# Altium PCB PCB.PcbDoc (part 1 of 2)
Units mil, origin at the board's own origin, x right, y up, seen from the top; angles counter-clockwise.
Board outline 1675.38 x 2135.38 mil, 2 copper layers (Top Layer, Bottom Layer), stack 54.768 mil thick; 71 components, 62 nets, 275 pads, 248 vias.
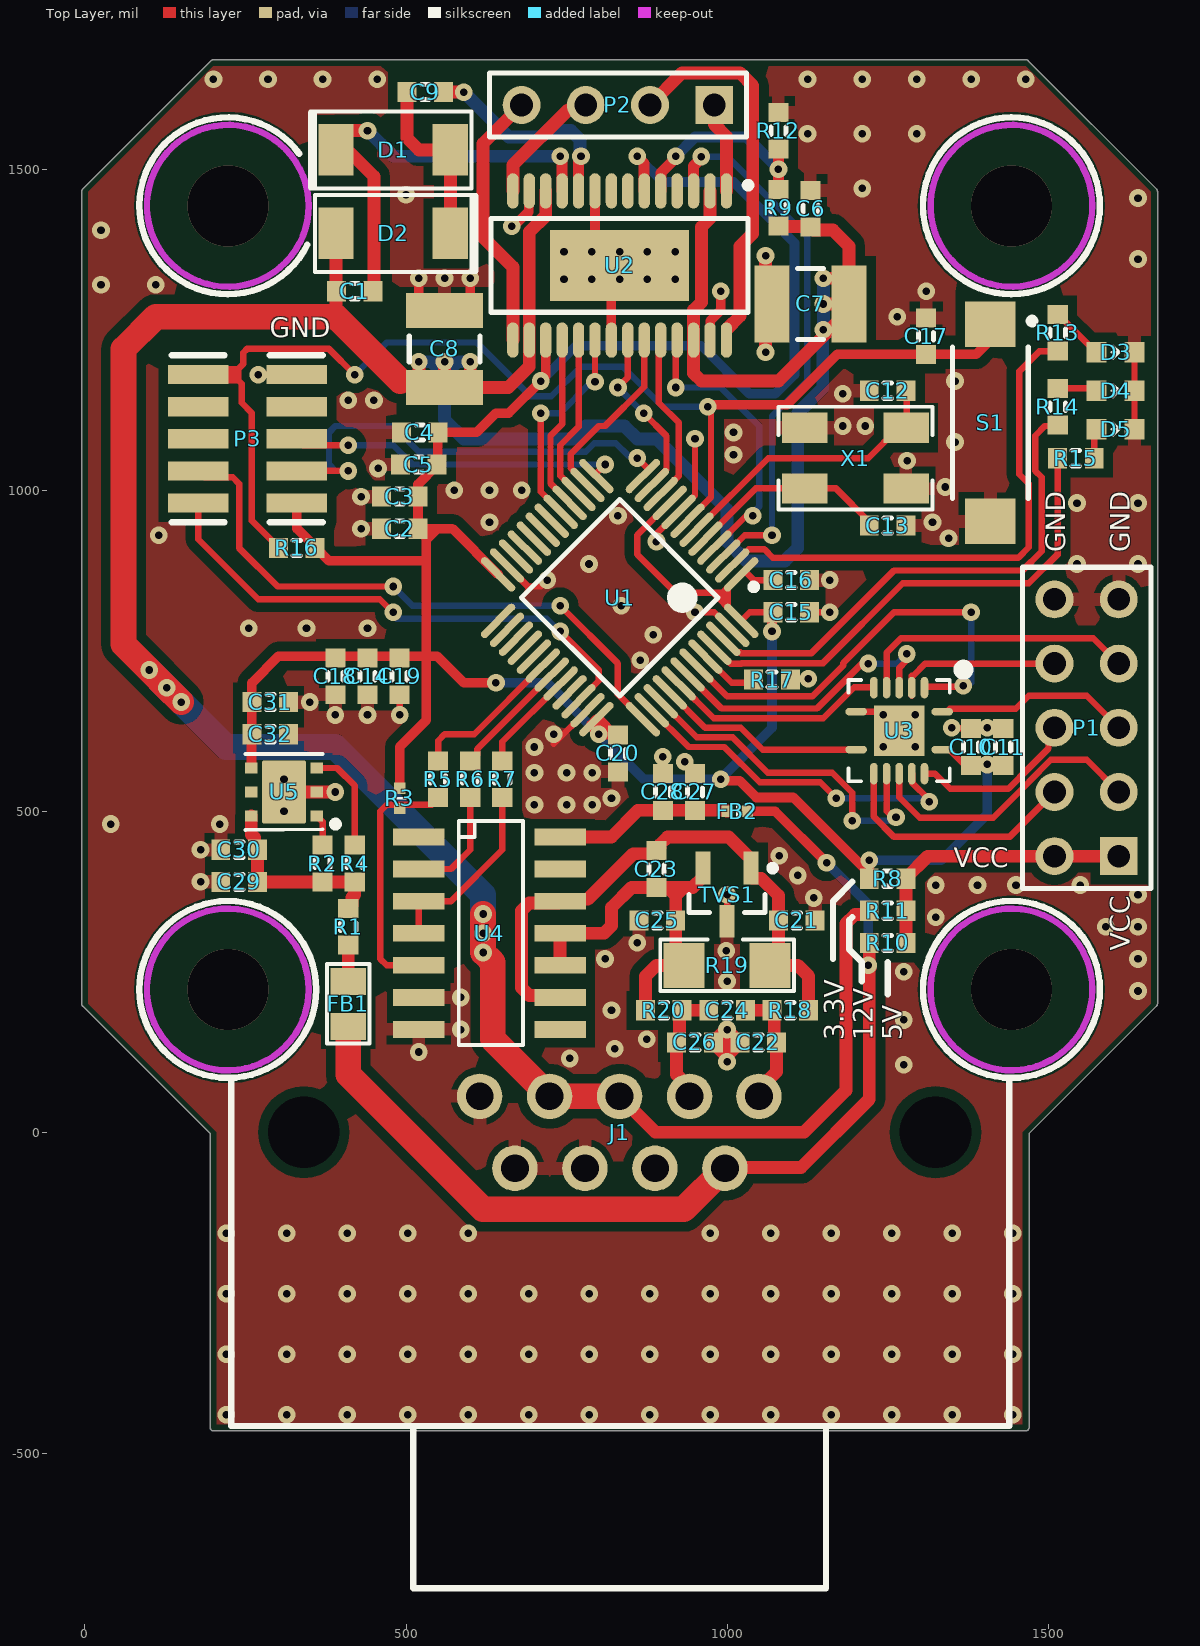
[diagram p0: Top Layer view]
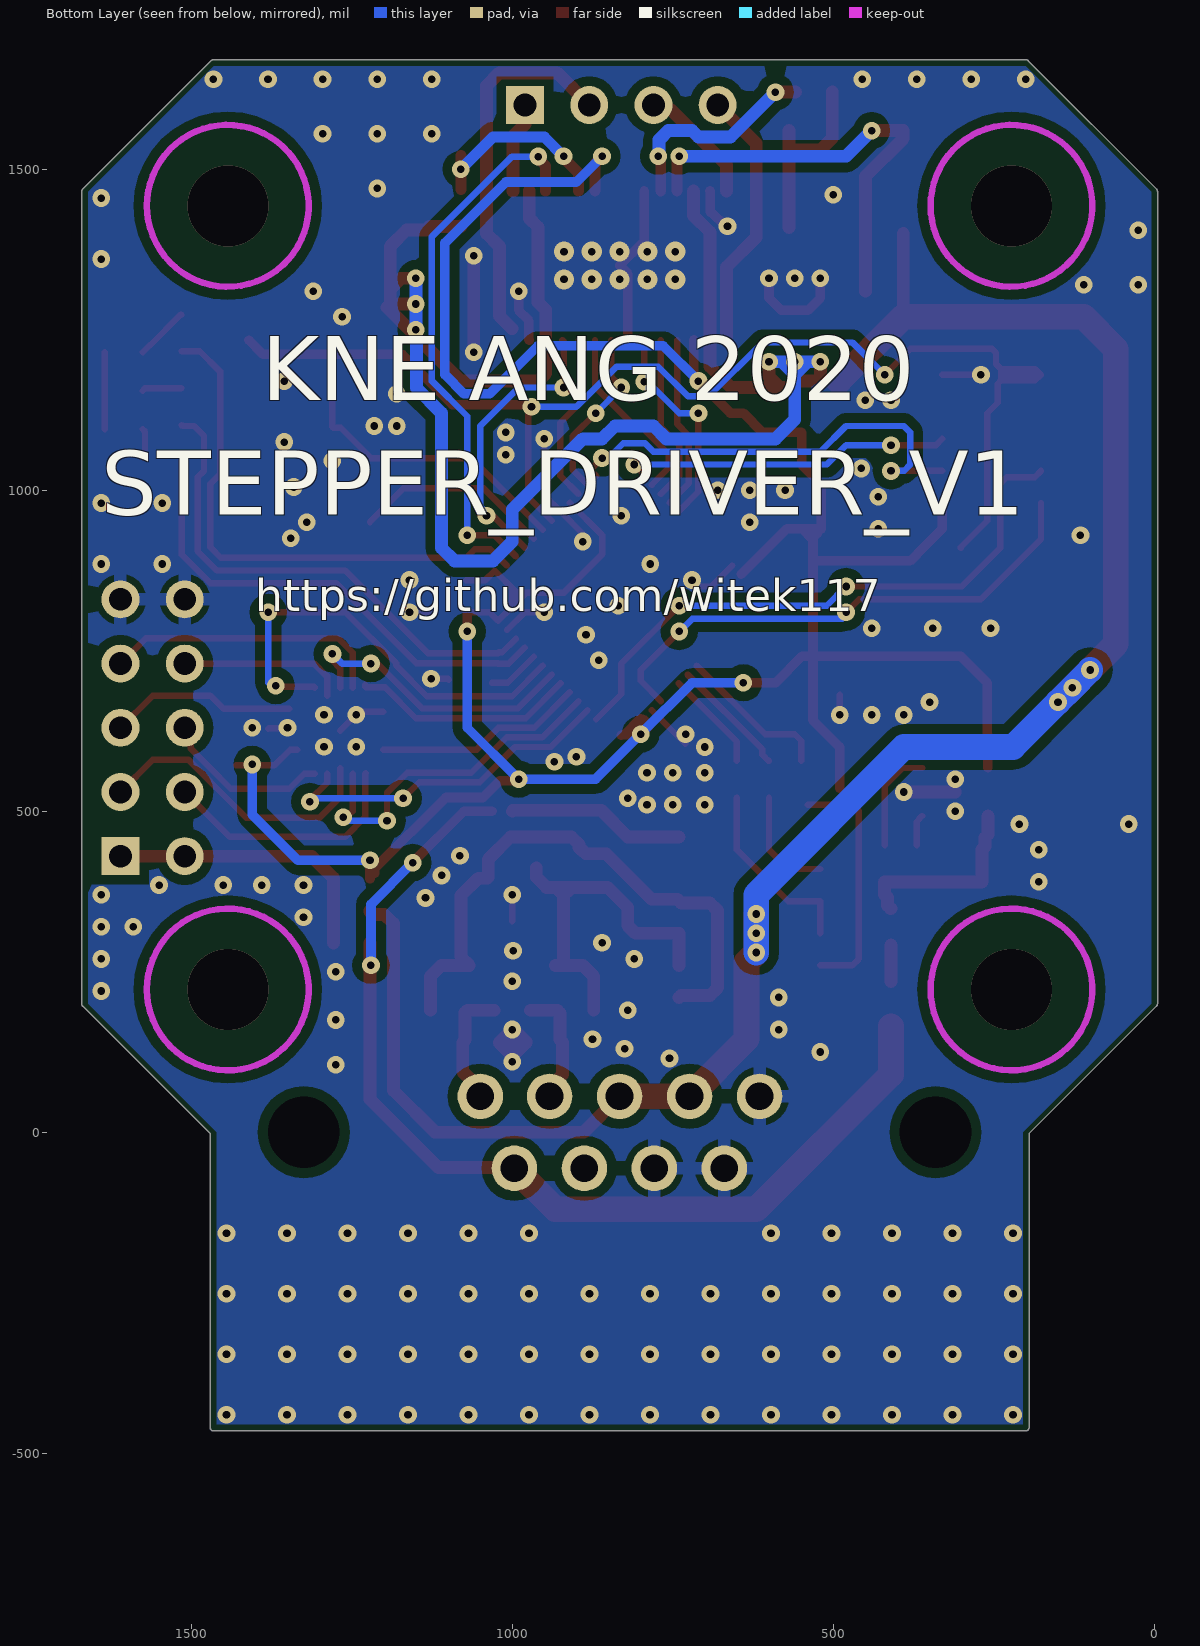
[diagram p1: Bottom Layer view, seen from below]
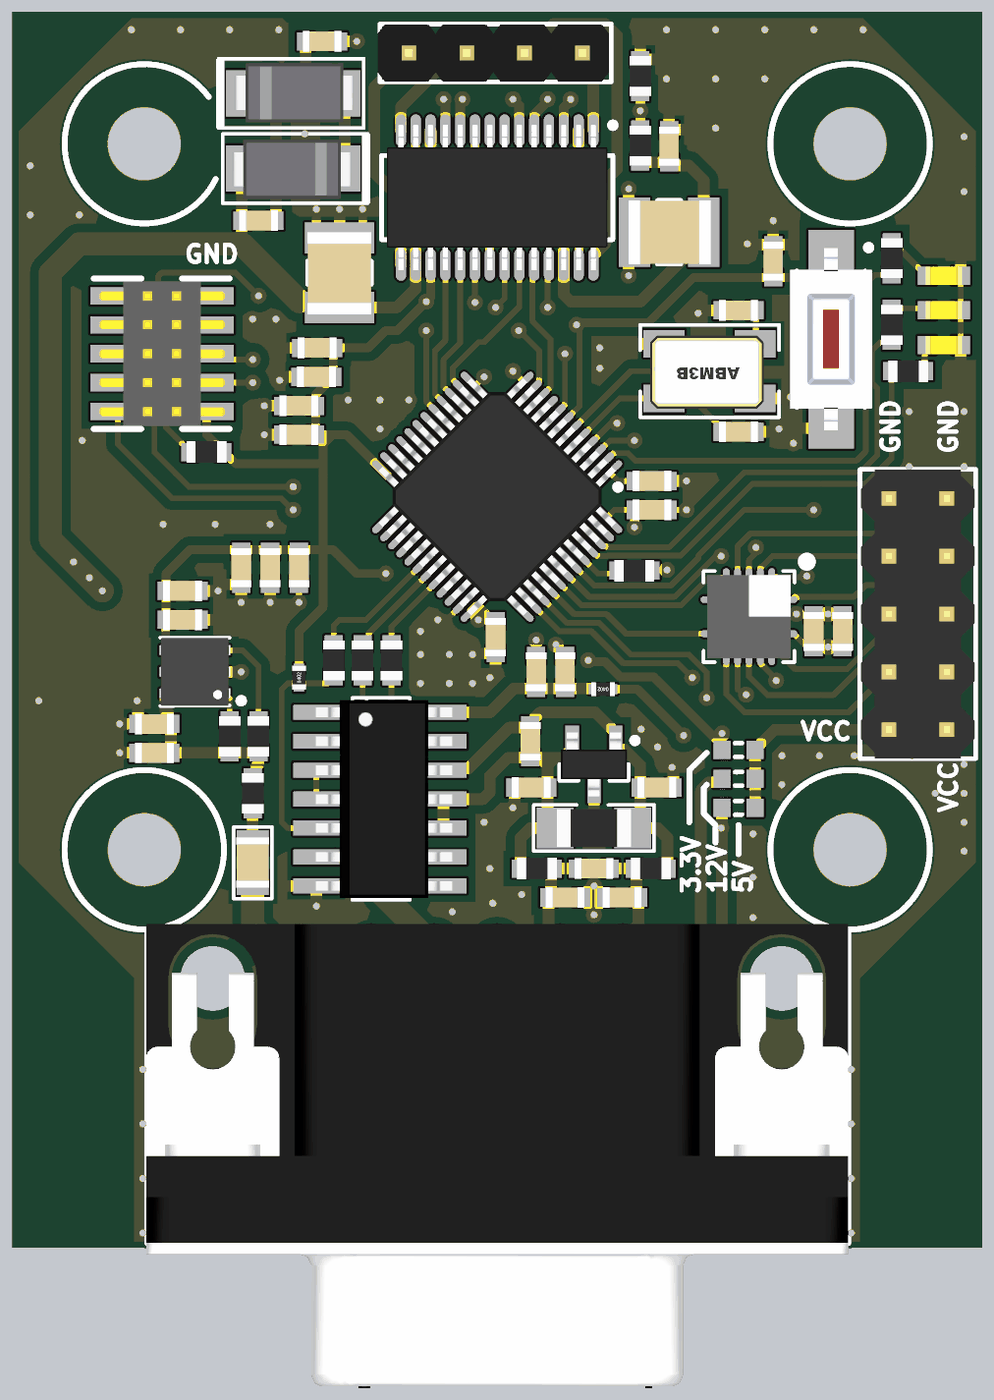
[diagram p2: 3D render of the assembled board from above, using the file's embedded part models]

## Layer stack, top to bottom
Top Solder: solder mask 0.4, Solder Resist, Dk 3.5
Top Layer: signal copper 1.4
Dielectric 1: dielectric 51.9685, FR-4, Dk 4.8
Bottom Layer: signal copper 1.4
Bottom Solder: solder mask 0.4, Solder Resist, Dk 3.5

## Board outline
194.99,-460 194.99,-2.08 -3.55,196.45 -3.53,196.44 cw(c0,200) -5.01,200 -5.01,1465.35 cw(c0,1465.35) -3.53,1468.92 -3.55,1468.9 196.45,1668.9 196.44,1668.88 cw(c200,1665.35) 200,1670.37 1465.35,1670.37 cw(c1465.35,1665.35) 1468.92,1668.88 1468.9,1668.9 1668.9,1468.9 1668.88,1468.92 cw(c1665.35,1465.35) 1670.37,1465.35 1670.37,200 cw(c1665.35,200) 1668.88,196.44 1668.9,196.45 1470.37,-2.08 1470.37,-460 cw(c1465.35,-460) 1465.35,-465.02 200,-465.02 cw(c200,-460)

## Design rules (kind name [scope] priority, off if disabled: settings)
Clearance [All] p1: gap=5 ignorepadtopadclearanceinfootprint=FALSE except(15: Arc-Poly Track-Poly SMDPad-Poly THPad-Poly Via-Poly Fill-Poly Poly-Poly Poly-Region Poly-Text Poly-Hole)
HoleSize [All] p1: absolutevalues=TRUE maxlimit=157.48 minlimit=1 maxpercent=80.000 minpercent=20.000
MinimumSolderMaskSliver [All] p1: minsoldermaskwidth=2
PolygonConnect PolygonConnect_via [IsVia] p1: connectstyle=Direct reliefconductorwidth=20 reliefentries=4 polygonreliefangle="90 Angle" airgapwidth=10
PolygonConnect [All] p2: connectstyle=Relief reliefconductorwidth=20 reliefentries=4 polygonreliefangle="90 Angle" airgapwidth=10
RoutingVias [All] p1: holewidth=28 width=50 viastyle="Through Hole" minholewidth=7.87 minwidth=19.68 maxholewidth=157.48 maxwidth=157.48
SilkToSilkClearance [All] p1: silktosilkclearance=5
SilkToSolderMaskClearance [IsPad] p1: minsilkscreentomaskgap=2 clearancetoexposedcopper=TRUE
SolderMaskExpansion [All] p1: expansion=4 istentingtop=FALSE
Width [All] p1: maxlimit=50 minlimit=6 preferedwidth=10
26 further rules are at their usual default settings.

## Classes and differential pairs
component class U_LD39050PU33R: C26 C29 C32
component class top: C5 C6 C7 C8 C9 C10 C11 C19 C25 C26 C29 C32 D1 D2 D3 D4 D5 FB1 J1 P1 R1 R2 R3 R4 R5 R6 R8 R9 R10 R11 R15 R16 U2 U3 X1
component class Designator: C23 C27 FB2 U3
component class Designator: C21 C22 C23 C25 C26 C27 R14 R15 R20 TVS1

## Components (designator, comment, footprint, x,y, rotation, side; value= is the part's Value field where it differs from the comment)
C1 "Ceramic X7R" C_0603_1608 420,1310 r180 top value=220nF
C2 "Ceramic X5R" C_0603_1608 490,940 r180 top value=10uF
C3 "Ceramic X7R" C_0603_1608 490,990 r180 top value=100nF
C4 "Ceramic X5R" C_0603_1608 521.46,1090 r180 top value=10uF
C5 "Ceramic X7R" C_0603_1608 520,1040 r180 top value=100nF
C6 "Ceramic X7R" C_0603_1608 1130,1438.54 r90 top value=220nF
C7 "Ceramic X5R" C_1210_3225 1130,1290 r180 top value=100uF
C8 "Ceramic X5R" C_1210_3225 560,1220 r90 top value=100uF
C9 "Ceramic C0G" C_0603_1608 530,1620 r0 top value=10nF
C10 "Ceramic X7R" C_0603_1608 1380,600 r90 top value=100nF (schematic designator C19)
C11 "Ceramic X7R" C_0603_1608 1430,600 r90 top value=100nF (schematic designator C20)
C12 "Ceramic C0G" C_0603_1608 1250,1155 r180 top value=22pF (schematic designator C10)
C13 "Ceramic C0G" C_0603_1608 1250,945 r0 top value=22pF (schematic designator C11)
C14 "Ceramic X5R" C_0603_1608 440,710 r270 top value=4.7uF (schematic designator C12)
C15 "Ceramic X7R" C_0603_1608 1100,810 r0 top value=100nF (schematic designator C13)
C16 "Ceramic X7R" C_0603_1608 1100,860 r0 top value=100nF (schematic designator C14)
C17 "Ceramic X7R" C_0603_1608 1310,1240 r90 top value=100nF (schematic designator C15)
C18 "Ceramic X5R" C_0603_1608 390,710 r270 top value=2.2uF (schematic designator C16)
C19 "Ceramic X7R" C_0603_1608 490,710 r270 top value=100nF (schematic designator C17)
C20 "Ceramic X7R" C_0603_1608 830,590 r270 top value=100nF (schematic designator C18)
C21 "Ceramic C0G" C_0603_1608 1108.54,330 r0 top value=1nF (schematic designator C26)
C22 "Ceramic C0G" C_0603_1608 1048.54,140 r180 top value=100pF (schematic designator C27)
C23 "Ceramic C0G" C_0603_1608 890,410 r270 top value=1nF (schematic designator C28)
C24 "Ceramic C0G" C_0603_1608 1000,190 r180 top value=100pF (schematic designator C29)
C25 "Ceramic C0G" C_0603_1608 891.46,330 r180 top value=1nF (schematic designator C30)
C26 "Ceramic C0G" C_0603_1608 950,140 r0 top value=100pF (schematic designator C31)
C27 "Ceramic X7R" C_0603_1608 950,530 r90 top value=1uF (schematic designator C24)
C28 "Ceramic X7R" C_0603_1608 900,530 r90 top value=100nF (schematic designator C25)
C29 "Ceramic X7R" C_0603_1608 240,390 r180 top value=1uF (schematic designator C1)
C30 "Ceramic X7R" C_0603_1608 240,440 r180 top value=1uF (schematic designator C2)
C31 "Ceramic X7R" C_0603_1608 288.54,670 r0 top value=1uF (schematic designator C3)
C32 "Ceramic X7R" C_0603_1608 288.54,620 r0 top value=1uF (schematic designator C4)
D1 "S1B-E3" SMA_DO-214AC 480,1530 r0 top value=S1B-E3/5AT
D2 "S1B-E3" SMA_DO-214AC 480,1400 r180 top value=S1B-E3/5AT
D3 "Green Led" OL_0603_1608 1605,1215 r180 top value=LTST-C190TGKT
D4 "Green Led" OL_0603_1608 1605,1155 r180 top value=LTST-C190TGKT
D5 "Green Led" OL_0603_1608 1605,1095 r180 top value=LTST-C190TGKT
FB1 "Ferrite bead" FB_0805_2012 410,200 r90 top value=742792022
FB2 "Ferrite bead" FB_0402_1005 1015.75,500 r180 top value=BLM15EG121SH1D (schematic designator FB3)
J1 "DSUB 9 Pin" J_DSUB_MHDD9F-T-B-S-RBM 832.68,0 r0 top value=MHDD9F-T-B-S-RBM
P1 "Goldpin male" P_HEADER_2x5_2.54 1610,430 r90 top value=DS1021-2*5SF11 (schematic designator P3)
P2 "Goldpin" P_HEADER_1x4_2.54 980,1600 r180 top value=DS1021-1*4SF1-1 (schematic designator P1)
P3 "Jtag" P_HEADER_2x5_1.27 250,1080 r90 top value=20021121-00010C4LF (schematic designator P2)
R1 "Resistor" R_0603_1608 410,320 r90 top value=1R
R2 "Resistor" R_0603_1608 370,418.54 r90 top value=100k
R3 "Resistor" R_0402_1005 490,520 r90 top value=100k
R4 "Resistor" R_0603_1608 420,418.54 r90 top value=100k
R5 "Resistor" R_0603_1608 550,550 r270 top value=10R
R6 "Resistor" R_0603_1608 600,550 r90 top value=10R (schematic designator R7)
R7 "Resistor" R_0603_1608 650,550 r270 top value=10R (schematic designator R8)
R8 "Resistor" R_NC_0603_1608 1250,395 r0 top value=NC (schematic designator R12)
R9 "Resistor" R_0603_1608 1080,1440 r270 top value=64.9k
R10 "Resistor" R_NC_0603_1608 1250,295 r0 top value=NC (schematic designator R13)
R11 "Resistor" R_NC_0603_1608 1250,345 r0 top value=NC (schematic designator R14)
R12 "Resistor" R_0603_1608 1080,1560 r270 top value=2.7k (schematic designator R10)
R13 "Resistor" R_0603_1608 1515,1245 r90 top value=2.7k (schematic designator R17)
R14 "Resistor" R_0603_1608 1515,1130 r90 top value=2.7k (schematic designator R18)
R15 "Resistor" R_0603_1608 1543.31,1049.84 r0 top value=2.7k (schematic designator R19)
R16 "Resistor" R_0603_1608 330,910 r180 top value=10k (schematic designator R6)
R17 "Resistor" R_0603_1608 1070,705 r180 top value=100k (schematic designator R11)
R18 "Resistor" R_0603_1608 1098.54,190 r0 top value=10R (schematic designator R15)
R19 "Resistor" R_1206_3216 1000,260 r0 top value=120R (schematic designator R16)
R20 "Resistor" R_0603_1608 901.46,190 r180 top value=10R (schematic designator R28)
S1 "3x6mm" S_TACTSWITCH3x6 1410,1105 r270 top
TVS1 "TVS double bidirectional" SOT23_N 1000,370 r270 top value=CDSOT23-SM712 (schematic designator TVS5)
U1 "STM32F103C8T6" LQFP48_7x7 832.68,832.68 r225 top (schematic designator U3)
U2 "Fully integrated microstepping motor driver with motion engine and SPI" HTSSOP28 832.68,1350 r270 top value=L6470HTR
U3 "Open drain buffer" QFN14_4x4 1268.07,625.47 r180 top value=SN74LVC06ARGYR (schematic designator U4)
U4 "MAX3076 Series 16 Mbps 6 V Full Duplex SMT RS 485 Transceiver - SOIC-14" SOP14_SO14_SOIC14_4X9X18 630,310 r270 top value=MAX3076EASD+ (schematic designator U1)
U5 "LD39050PU33R" DFN6_3x3 310,530 r90 top (schematic designator U1)
X1 "8MHz" X_ABM3B_5X3X11 1200,1050 r0 top

## Footprints (in the part's own frame and the unit in brackets; to place one, negate y for a bottom-side part, rotate by r counter-clockwise, add the part's x,y. Pads: shape width x height; smd on the part's side, far side on the other; paste and mask are expansions set on the pad)
C_0603_1608 [mm]
  rect 0.75x0.8 smd: 1(-0.725,0) 2(0.725,0)
  silkscreen extent -0.15,-0.3 0.15,0.3, body extent -0.85,-0.45 0.85,0.45, height 0.89
C_1210_3225 [mil]
  rect 54x120 smd: 1(-60,0) 2(60,0)
  silkscreen extent -20,-55 20,55, body extent -72,-55 70,55, height 86
DFN6_3x3 [mm]
  rect 0.45x0.5 smd: 1(-0.95,-1.3) 2(0,-1.3) 3(0.95,-1.3) 4(0.95,1.3) 5(0,1.3) 6(-0.95,1.3)
  rrect10% 2.5x1.75 smd: EP1(0,0)
  silkscreen extent -1.5,-2.16 1.5,1.52, body extent -1.5,-1.55 1.5,1.55, height 0.75
FB_0402_1005 [mm]
  rect 0.45x0.45 smd: 1(-0.4,0) 2(0.4,0)
  silkscreen extent 0,-0.25 0,0.25, body extent -0.52,-0.3 0.52,0.3, height 0.34
FB_0805_2012 [mil]
  rect 42x55 smd: 1(-35,0) 2(35,0)
  silkscreen extent -62,-33 62,33, body extent -43,-29 44,29, height 53
HTSSOP28 [mm]
  oval 1.4x0.45 smd: 1(-2.95,4.225) 2(-2.95,3.575) 3(-2.95,2.925) 4(-2.95,2.275) 5(-2.95,1.625) 6(-2.95,0.975) 7(-2.95,0.325) 8(-2.95,-0.325) 9(-2.95,-0.975) 10(-2.95,-1.625) 11(-2.95,-2.275) 12(-2.95,-2.925) 13(-2.95,-3.575) 14(-2.95,-4.225) 15(2.95,-4.225) 16(2.95,-3.575) 17(2.95,-2.925) 18(2.95,-2.275) 19(2.95,-1.625) 20(2.95,-0.975) 21(2.95,-0.325) 22(2.95,0.325) 23(2.95,0.975) 24(2.95,1.625) 25(2.95,2.275) 26(2.95,2.925) 27(2.95,3.575) 28(2.95,4.225)
  rect 2.8x5.5 smd: EP1(0,0)
  silkscreen extent -3.3,-5.08 1.85,5.21, body extent -3.2,-4.85 3.2,4.85, height 0.92
J_DSUB_MHDD9F-T-B-S-RBM [mm] "D-SUB; 9 Position; Female"
  round 1.524 hole 2.845 unplated: 0(-12.497,0) 0(12.497,0)
  round 1.8 hole 1.1: 1(5.512,1.422) 2(2.769,1.422) 3(0,1.422) 4(-2.769,1.422) 5(-5.537,1.422) 6(4.166,-1.422) 7(1.397,-1.422) 8(-1.372,-1.422) 9(-4.14,-1.422)
  silkscreen extent -15.37,-18.04 15.42,2.16, body extent -15.42,-18 15.42,2.4, height 12.5
LQFP48_7x7 [mm] "LQFP, 48-Leads, Body 7x7mm, Pitch 0.5mm, IPC Medium Density"
  oval 1.8x0.3 smd: 1(-4.05,2.75) 2(-4.05,2.25) 3(-4.05,1.75) 4(-4.05,1.25) 5(-4.05,0.75) 6(-4.05,0.25) 7(-4.05,-0.25) 8(-4.05,-0.75) 9(-4.05,-1.25) 10(-4.05,-1.75) 11(-4.05,-2.25) 12(-4.05,-2.75) 25(4.05,-2.75) 26(4.05,-2.25) 27(4.05,-1.75) 28(4.05,-1.25) 29(4.05,-0.75) 30(4.05,-0.25) 31(4.05,0.25) 32(4.05,0.75) 33(4.05,1.25) 34(4.05,1.75) 35(4.05,2.25) 36(4.05,2.75)
  oval 0.3x1.8 smd: 13(-2.75,-4.05) 14(-2.25,-4.05) 15(-1.75,-4.05) 16(-1.25,-4.05) 17(-0.75,-4.05) 18(-0.25,-4.05) 19(0.25,-4.05) 20(0.75,-4.05) 21(1.25,-4.05) 22(1.75,-4.05) 23(2.25,-4.05) 24(2.75,-4.05) 37(2.75,4.05) 38(2.25,4.05) 39(1.75,4.05) 40(1.25,4.05) 41(0.75,4.05) 42(0.25,4.05) 43(-0.25,4.05) 44(-0.75,4.05) 45(-1.25,4.05) 46(-1.75,4.05) 47(-2.25,4.05) 48(-2.75,4.05)
  silkscreen extent -4.17,-2.75 2.75,3.57, body extent -4.5,-4.5 4.5,4.5, height 1.6
OL_0603_1608 [mm]
  rect 0.8x0.8 smd: 1(-0.75,0) 2(0.75,0)
  silkscreen extent -0.15,-0.25 0.15,0.25, body extent -0.8,-0.4 0.8,0.4, height 0.75
P_HEADER_1x4_2.54 [mm] "Connector; Header; 4 Position; Male"
  rect 1.5x1.5 hole 0.9: 1(0,0)
  round 1.5 hole 0.9: 2(2.54,0) 3(5.08,0) 4(7.62,0)
  silkscreen extent -1.27,-1.27 8.89,1.27, body extent -1.17,-1.25 8.99,1.25, height 8.2
P_HEADER_2x5_1.27 [mm]
  rect 0.76x2.4 smd: 1(-2.54,-2.032) 2(-2.54,1.868) 3(-1.27,-2.032) 4(-1.27,1.868) 5(0,-2.032) 6(0,1.868) 7(1.27,-2.032) 8(1.27,1.868) 9(2.54,-2.032) 10(2.54,1.868)
  silkscreen extent -3.3,-3.05 3.3,2.92, body extent -3.17,-2.83 3.18,2.67, height 4.51
P_HEADER_2x5_2.54 [mm] "Connector; Header"
  rect 1.5x1.5 hole 0.9: 1(0,0)
  round 1.5 hole 0.9: 2(0,2.54) 3(2.54,0) 4(2.54,2.54) 5(5.08,0) 6(5.08,2.54) 7(7.62,0) 8(7.62,2.54) 9(10.16,0) 10(10.16,2.54)
  silkscreen extent -1.27,-1.27 11.43,3.81, body extent -1.27,-1.23 11.43,3.77, height 8.4
QFN14_4x4 [mm]
  oval 0.85x0.3 smd: 1(-1.7,-0.75) 7(1.7,-0.75) 8(1.7,0.75) 14(-1.7,0.75)
  oval 0.3x0.85 smd: 2(-1,-1.7) 3(-0.5,-1.7) 4(0,-1.7) 5(0.5,-1.7) 6(1,-1.7) 9(1,1.7) 10(0.5,1.7) 11(0,1.7) 12(-0.5,1.7) 13(-1,1.7)
  rect 2x2 smd paste-2.54: EP1(0,0)
  silkscreen extent -2.68,-2.55 2,2, body extent -1.82,-1.82 1.82,1.82, height 1.01
R_0402_1005 [mm]
  rect 0.45x0.45 smd: 1(-0.4,0) 2(0.4,0)
  silkscreen extent 0,-0.25 0,0.25, body extent -0.52,-0.3 0.52,0.3, height 0.34
R_0603_1608 [mm]
  rect 0.75x0.8 smd: 1(-0.725,0) 2(0.725,0)
  silkscreen extent -0.15,-0.3 0.15,0.3, body extent -0.87,-0.47 0.88,0.48, height 0.54
R_1206_3216 [mil]
  rect 64x70 smd: 1(-67,0) 2(67,0)
  silkscreen extent -104,-40 104,40, body extent -64,-32 64,32, height 27
R_NC_0603_1608 [mm]
  rect 0.75x0.8 smd: 1(-0.725,0) 2(0.725,0)
  silkscreen extent -0.15,-0.3 0.15,0.3, body extent -0.87,-0.47 0.88,0.48, height 0.54
S_TACTSWITCH3x6 [mm] "SODFL, 2-Leads, Body 3,00x8,00mm, IPC Medium Density"
  rect 1.8x2 smd: 1(-3.9,0) 2(3.9,0)
  silkscreen extent -4.15,-1.5 3,1.78, body extent -4,-1.8 4,1.8, height 2.6
SMA_DO-214AC [mil]
  rect 55x80 smd: 1(-89,0) 2(89,0)
  silkscreen extent -133,-60 122,60, body extent -100,-50 104,52, height 95
SOP14_SO14_SOIC14_4X9X18 [mil]
  rect 26x80 smd: 1(-150,-110) 2(-100,-110) 3(-50,-110) 4(0,-110) 5(50,-110) 6(100,-110) 7(150,-110) 8(150,110) 9(100,110) 10(50,110) 11(0,110) 12(-50,110) 13(-100,110) 14(-150,110)
  silkscreen extent -175,-48 174,52, body extent -171,-111 171,125, height 67
SOT23_N [mm] "SOT23, 3-Leads, Body 2.9x1.3mm, Pitch 0.95mm, Lead Span 2.3mm, IPC Medium Density"
  rect 1.3x0.6 smd: 1(-1.05,0.95) 2(-1.05,-0.95) 3(1.05,0)
  silkscreen extent -1.17,-1.5 0.7,1.93, body extent -1.4,-1.45 1.4,1.45, height 1.29
X_ABM3B_5X3X11 [mm]
  rect 1.8x1.2 smd: 1(-2,-1.2) 2(2,-1.2) 3(2,1.2) 4(-2,1.2)
  silkscreen extent -3.05,-2.03 3.05,2.03, body extent -2.62,-1.65 2.38,1.55, height 1.1

## Part data
C1 C6: library part C_220nF_25V_X7R_0603_10, "Capacitor", Dielectric=X7R, Manufacturer=Murata, Manufacturer Part Number=GCM188R71E224KA55D, Tolerance (%)=10, Voltage=25V, HelpURL=http://psearch.en.murata.com/capacitor/product/GCM188R71E224KA55%23.pdf, Part Number=C_220nF_25V_X7R_0603_10, SCH_Footprint=0603, Supplier 1=TME, Supplier 2="RS Components", Supplier 3=Farnell, Supplier 4=Mouser, Supplier 5=Digi-Key, Supplier Part Number 1=GCM188R71E224KA55D, Supplier Part Number 2=7234976, Supplier Part Number 3=2688625, Supplier Part Number 4=81-GCM188R71E224K55D, Supplier Part Number 5=490-4935-1-ND
C2 C4: library part C_10uF_16V_X5R_0603_20, "Capacitor", Dielectric=X5R, Manufacturer="Samsung Electro-Mechanics", Manufacturer Part Number=CL10A106MO8NQNC, Tolerance (%)=20, Voltage=16V, HelpURL=http://www.tme.eu/pl/Document/4a42202b32dab16128fe107dd69598cc/samsung-chip-cap.pdf, Part Number=C_10uF_16V_X5R_0603_20, SCH_Footprint=0603, Supplier 1=TME, Supplier 2="RS Components", Supplier 3=Farnell, Supplier 4=Mouser, Supplier 5=Digi-Key, Supplier Part Number 1=CL10A106MO8NQNC
C3 C5 C10 C11 C15 C16 C17 C19 C20 C28: library part C_100nF_50V_X7R_0603_5, "Capacitor", Dielectric=X7R, Manufacturer=Samsung, Manufacturer Part Number=CL10B104JB8NNNC, Tolerance (%)=5, Voltage=50V, HelpURL=http://www.tme.eu/pl/Document/4a42202b32dab16128fe107dd69598cc/samsung-chip-cap.pdf, Part Number=C_100nF_50V_X7R_0603_5, SCH_Footprint=0603, Supplier 1=TME, Supplier 2="RS Components", Supplier 3=Farnell, Supplier 4=Mouser, Supplier 5=Digi-Key, Supplier Part Number 1=CL10B104JB8NNNC
C7 C8: library part C_100uF_6.3V_X5R_1210_20, "Capacitor", Dielectric=X5R, Manufacturer=TDK, Manufacturer Part Number=C3225X5R0J107M250AC, Tolerance (%)=20, Voltage=6.3V, HelpURL=https://datasheet.octopart.com/C3225X5R0J107M250AC-TDK-datasheet-41194876.pdf, Part Number=C_100uF_6.3V_X5R_1210_20, SCH_Footprint=1210, Supplier 1=TME, Supplier 2="RS Components", Supplier 3=Farnell, Supplier 4=Mouser, Supplier 5=Digi-Key, Supplier Part Number 2=7407685P, Supplier Part Number 3=2522162, Supplier Part Number 4=810-C3225X5R0J107M, Supplier Part Number 5=445-1437-1-ND
C9: library part C_10nF_50V_C0G_0603_5, "Capacitor", Dielectric=C0G, Manufacturer=Murata, Manufacturer Part Number=GRM1885C1H103JA01D, Tolerance (%)=5, Voltage=50V, HelpURL=https://datasheet.octopart.com/GRM1885C1H103JA01D-Murata-datasheet-34231350.pdf, Part Number=C_10nF_50V_C0G_0603_5, SCH_Footprint=0603, Supplier 1=TME, Supplier 2="RS Components", Supplier 3=Farnell, Supplier 4=Mouser, Supplier 5=Digi-Key, Supplier Part Number 1=GRM1885C1H103JA01D, Supplier Part Number 2=144-9032, Supplier Part Number 3=2456107, Supplier Part Number 4=81-GRM1885C1H103JA1D, Supplier Part Number 5=490-9666-1-ND
C12 C13: library part C_22pF_50V_C0G_0603_5, "Capacitor", Dielectric=C0G, Manufacturer=AVX, Manufacturer Part Number=06035A220JAT2A, Tolerance (%)=5, Voltage=50V, HelpURL=https://datasheet.octopart.com/06035A220JAT2A-AVX-datasheet-9883399.pdf, Part Number=C_22pF_50V_C0G_0603_5, SCH_Footprint=0603, Supplier 1=TME, Supplier 2="RS Components", Supplier 3=Farnell, Supplier 4=Mouser, Supplier 5=Digi-Key, Supplier Part Number 2=1349628, Supplier Part Number 3=2280861, Supplier Part Number 4=581-06035A220J, Supplier Part Number 5=478-1167-1-ND
C14: library part C_4.7uF_16V_X5R_0603_10, "Capacitor", Dielectric=X5R, Manufacturer=Murata, Manufacturer Part Number=GRM188R61C475KAAJD, Tolerance (%)=10, Voltage=16V, HelpURL=https://datasheet.octopart.com/GRM188R61C475KAAJD-Murata-datasheet-66077093.pdf, Part Number=C_4.7uF_16V_X5R_0603_10, SCH_Footprint=0603, Supplier 1=TME, Supplier 2="RS Components", Supplier 3=Farnell, Supplier 4=Mouser, Supplier 5=Digi-Key, Supplier Part Number 2=884-7264P, Supplier Part Number 3=2611924, Supplier Part Number 4=81-GRM188R61C475KAJD, Supplier Part Number 5=490-10481-2-ND
C18: library part C_2.2uF_35V_X5R_0603_10, "Capacitor", Dielectric=X5R, Manufacturer=Murata, Manufacturer Part Number=GRM188R6YA225KA12D, Tolerance (%)=10, Voltage=35V, HelpURL=https://datasheet.octopart.com/GRM188R6YA225KA12D-Murata-datasheet-66077095.pdf, Part Number=C_2.2uF_35V_X5R_0603_10, SCH_Footprint=0603, Supplier 1=TME, Supplier 2="RS Components", Supplier 3=Farnell, Supplier 4=Mouser, Supplier 5=Digi-Key, Supplier Part Number 2=8151358, Supplier Part Number 3=2611926, Supplier Part Number 4=81-GRM188R6YA225KA2D, Supplier Part Number 5=490-7204-1-ND
C21 C23 C25: library part C_1nF_50V_C0G_0603_5, "Capacitor", Dielectric=C0G, Manufacturer=Samsung, Manufacturer Part Number=CL10C102JB8NNNC, Tolerance (%)=5, Voltage=50V, HelpURL=http://www.tme.eu/pl/Document/7da762c1dbaf553c64ad9c40d3603826/mlcc_samsung.pdf, Part Number=C_1nF_50V_C0G_0603_5, SCH_Footprint=0603, Supplier 1=TME, Supplier 2="RS Components", Supplier 3=Farnell, Supplier 4=Mouser, Supplier 5=Digi-Key, Supplier Part Number 1=CL10C102JB8NNNC
C22 C24 C26: library part C_100pF_50V_C0G_0603_5, "Capacitor", Dielectric=C0G, Manufacturer=AVX, Manufacturer Part Number=06035A101JAT2A, Tolerance (%)=5, Voltage=50V, HelpURL=http://www.tme.eu/pl/Document/28556c2a4dfa60995042b7f5f1edb9ed/AVX-C0G.pdf, Part Number=C_100pF_50V_C0G_0603_5, SCH_Footprint=0603, Supplier 1=TME, Supplier 2="RS Components", Supplier 3=Farnell, Supplier 4=Mouser, Supplier 5=Digi-Key, Supplier Part Number 1=06035A101JAT2A
C27 C29 C30 C31 C32: library part C_1uF_25V_X7R_0603_10, "Capacitor", Dielectric=X7R, Manufacturer=Samsung, Manufacturer Part Number=CL10B105KA8NNNC, Tolerance (%)=10, Voltage=25V, HelpURL=http://www.tme.eu/pl/Document/4a42202b32dab16128fe107dd69598cc/samsung-chip-cap.pdf, Part Number=C_1uF_25V_X7R_0603_10, SCH_Footprint=0603, Supplier 1=TME, Supplier 2="RS Components", Supplier 3=Farnell, Supplier 4=Mouser, Supplier 5=Digi-Key, Supplier Part Number 1=CL10B105KA8NNNC
D1 D2: library part D_S1BE3/61T_1A_100V_SMA, Current=1A, Manufacturer=Vishay, Manufacturer Part Number=S1B-E3/5AT, Voltage=100V, HelpURL=https://www.verical.com/datasheet/vishay-rectifier-s1be3-61t-768273.pdf, Part Number=D_S1BE3/61T_1A_100V_SMA, SCH_Footprint=SMA, Supplier 1=TME, Supplier 2="RS Components", Supplier 3=Farnell, Supplier 4=Mouser, Supplier 5=Digi-Key, Supplier Part Number 3=9550224, Supplier Part Number 4=625-S1B-E3/5AT, Supplier Part Number 5=S1B-E3/5AT-ND
D3 D4 D5: library part OL_G_0603, "LED GREEN", Manufacturer=Lite-On, Manufacturer Part Number=LTST-C190TGKT, HelpURL=https://datasheet.octopart.com/LTST-C190TGKT-Lite-On-datasheet-158437.pdf, Part Number=OL_G_0603, SCH_Footprint=0603, Supplier 1=TME, Supplier 2="RS Components", Supplier 3=Farnell, Supplier 4=Mouser, Supplier 5=Digi-Key, Supplier Part Number 1=LTST-C190TGKT, Supplier Part Number 2=6920997P, Supplier Part Number 4=859-LTST-C190TGKT, Supplier Part Number 5=160-2019-1-ND
FB1: library part FB_742792022, "Ferrite Bead", Current=2A, Manufacturer=Wurth, Manufacturer Part Number=742792022, Resistance=50mR, HelpURL=http://www.farnell.com/datasheets/1919973.pdf?_ga=2.197269935.1851800069.1516124392-930414557.1508304960, Part Number=FB_742792022, SCH_Footprint=0805, Supplier 1=TME, Supplier 2="RS Components", Supplier 3=Farnell, Supplier 4=Mouser, Supplier 5=Digi-Key, Supplier Part Number 3=1635733
FB2: library part FB_BLM15EG121SH1D, "Ferrite Bead", Current=1.5A, Manufacturer=Murata, Manufacturer Part Number=BLM15EG121SH1D, Resistance=95mR, HelpURL=http://datasheet.octopart.com/BLM15EG121SH1D-Murata-datasheet-37129980.pdf, Part Number=FB_BLM15EG121SH1D, SCH_Footprint=0402, Supplier 1=TME, Supplier 2="RS Components", Supplier 3=Farnell, Supplier 4=Mouser, Supplier 5=Digi-Key, Supplier Part Number 4=81-BLM15EG121SH1D, Supplier Part Number 5=490-17344-1-ND
J1: library part J_DSUB, "Header, 9-Pin", Manufacturer=-, Manufacturer Part Number=MHDD9F-T-B-S-RBM, Component Type=Standard, HelpURL=https://www.tme.eu/Document/d24efe21bdaa08410b5ca50a678e1de1/MHDDXX-F-T-B-S-RBM.PDF, Part Number=J_DSUB, SCH_Footprint=J_DSUB, Supplier 1=TME, Supplier 2="RS Components", Supplier 3=Farnell, Supplier 4=Mouser, Supplier 5=Digi-Key, Supplier Part Number 1=MHDD9F-T-B-S-RBM, Supplier Part Number 3=2533067
P1: library part P_HEADER_2x5_2.54, "Pin Header", Manufacturer=Connfly, Manufacturer Part Number=DS1021-2*5SF11, Supplier Part Number 1=ZL202-10G, Component Type=Standard, HelpURL=https://www.tme.eu/Document/cc301e58a5da78cb543a94b5a5b7f06a/DS1021.pdf, Part Number=P_HEADER_2x5_2.54, SCH_Footprint="2x5 2.54mm", Supplier 1=TME, Supplier 2="RS Components", Supplier 3=Farnell, Supplier 4=Mouser, Supplier 5=Digi-Key
P2: library part P_HEADER_1x4_2.54, "Pin Header", Manufacturer=Connfly, Manufacturer Part Number=DS1021-1*4SF1-1, Supplier Part Number 1=ZL201-04G, Component Type=Standard, HelpURL=http://datasheet.octopart.com/DS1021-1%2A4SF1-1-Connfly-datasheet-65537859.pdf, Part Number=P_HEADER_1x4_2.54, SCH_Footprint="1x4 2.54mm", Supplier 1=TME, Supplier 2="RS Components", Supplier 3=Farnell, Supplier 4=Mouser, Supplier 5=Digi-Key
P3: library part P_HEADER_2x5_1.27, "Header, 10-Pin, Dual row", Manufacturer=FCI, Manufacturer Part Number=20021121-00010C4LF, Component Type=Standard, HelpURL=http://www.mouser.com/catalog/645/usd/1591.pdf, Part Number=P_HEADER_2x5_1.27, SCH_Footprint="2x5 1.27mm", Supplier 1=TME, Supplier 2="RS Components", Supplier 3=Farnell, Supplier 4=Mouser, Supplier 5=Digi-Key, Supplier Part Number 1=20021121-00010C4LF, Supplier Part Number 2=794-4584, Supplier Part Number 3=1865279, Supplier Part Number 4=649-202112100010C4LF, Supplier Part Number 5=609-3695-1-ND
R1: library part R_1R_0603_1, Manufacturer=Yageo, Manufacturer Part Number=RC0603FR-071RL, Power=100mW, Supplier Part Number 1=RC0603FR-071R, Tolerance=1%, Voltage=50V, HelpURL=http://www.tme.eu/en/Document/9fef8ccbb584e9f6a1c931cf356afd5c/PYu-RC0603_51_RoHS_L_4.pdf, Part Number=R_1R_0603_1, SCH_Footprint=0603, Supplier 1=TME, Supplier 2="RS Components", Supplier 3=Farnell, Supplier 4=Mouser, Supplier 5=Digi-Key, Supplier Part Number 3=9238123, Supplier Part Number 4=603-RC0603FR-071RL, Supplier Part Number 5=311-1.00HRCT-ND
R2 R4 R17: library part R_100k_0603_1, Manufacturer=Royalohm, Manufacturer Part Number=0603SAF1003T5E, Power=100mW, Supplier Part Number 1=SMD0603-100K-1%, Tolerance=1%, Voltage=50V, HelpURL=http://www.tme.eu/pl/Document/b315665a56acbc42df513c99b390ad98/ROYALOHM-THICKFILM.pdf, Part Number=R_100k_0603_1, SCH_Footprint=0603, Supplier 1=TME, Supplier 2="RS Components", Supplier 3=Farnell, Supplier 4=Mouser, Supplier 5=Digi-Key, Supplier Part Number 4=667-ERJ-3EKF1003V, Supplier Part Number 5=P100KHCT-ND
R3: library part R_100k_0402_1, Manufacturer=Yageo, Manufacturer Part Number=RC0402FR-07100KL, Power=63mW, Supplier Part Number 1=RC0402FR-07100K, Tolerance=1%, Voltage=50V, HelpURL=http://www.tme.eu/pl/Document/1a2bc76e2be68b3b1670068306778ce6/rc0402yageo.pdf, Part Number=R_100k_0402_1, SCH_Footprint=0402, Supplier 1=TME, Supplier 2="RS Components", Supplier 3=Farnell, Supplier 4=Mouser, Supplier 5=Digi-Key, Supplier Part Number 3=2131798, Supplier Part Number 4=603-RC0402FR-07100KL, Supplier Part Number 5=311-100KLRCT-ND
R5 R6 R7 R18 R20: library part R_10R_0603_1, Manufacturer=Royalohm, Manufacturer Part Number=0603SAF100JT5E, Power=100mW, Supplier Part Number 1=SMD0603-10R-1%, Tolerance=1%, Voltage=50V, HelpURL=http://www.tme.eu/pl/Document/b315665a56acbc42df513c99b390ad98/ROYALOHM-THICKFILM.pdf, Part Number=R_10R_0603_1, SCH_Footprint=0603, Supplier 1=TME, Supplier 2="RS Components", Supplier 3=Farnell, Supplier 4=Mouser, Supplier 5=Digi-Key
R8 R10 R11: library part R_GENERIC_0603, Part Number=R_GENERIC_0603, SCH_Footprint=0603, Supplier 1=TME, Supplier 2="RS Components", Supplier 3=Farnell, Supplier 4=Mouser, Supplier 5=Digi-Key
R9: library part R_64.9k_0603_1, Manufacturer=Panasonic, Manufacturer Part Number=ERJ-3EKF6492V, Power=100mW, Tolerance=1%, Voltage=75V, HelpURL=https://industrial.panasonic.com/cdbs/www-data/pdf/RDA0000/AOA0000C304.pdf, Part Number=R_64.9k_0603_1, SCH_Footprint=0603, Supplier 1=TME, Supplier 2="RS Components", Supplier 3=Farnell, Supplier 4=Mouser, Supplier 5=Digi-Key, Supplier Part Number 2=1229382, Supplier Part Number 3=2059481, Supplier Part Number 4=667-ERJ-3EKF6492V, Supplier Part Number 5=P64.9KHCT-ND
R12 R13 R14 R15: library part R_2.7k_0603_1, Manufacturer=Royalohm, Manufacturer Part Number=0603SAF2701T5E, Power=100mW, Supplier Part Number 1=SMD0603-2K7-1%, Tolerance=1%, Voltage=50V, HelpURL=http://www.tme.eu/pl/Document/b315665a56acbc42df513c99b390ad98/ROYALOHM-THICKFILM.pdf, Part Number=R_2.7k_0603_1, SCH_Footprint=0603, Supplier 1=TME, Supplier 2="RS Components", Supplier 3=Farnell, Supplier 4=Mouser, Supplier 5=Digi-Key
R16: library part R_10k_0603_1, Manufacturer=Vishay, Manufacturer Part Number=CRCW060310K0FKTABC, Power=100mW, Tolerance=1%, Voltage=75V, HelpURL=http://www.tme.eu/pl/Document/622e28308c06d160637f2b14751ba16b/Data%20Sheet%20CRCW_BCe3.pdf, Part Number=R_10k_0603_1, SCH_Footprint=0603, Supplier 1=TME, Supplier 2="RS Components", Supplier 3=Farnell, Supplier 4=Mouser, Supplier 5=Digi-Key, Supplier Part Number 1=CRCW060310K0FKTABC, Supplier Part Number 4=667-ERJ-3EKF1002V, Supplier Part Number 5=P10KGCT-ND
R19: library part R_120R_1206_1, Manufacturer=Vishay, Manufacturer Part Number=CRCW1206120RFKEA, Power=250mW, Tolerance=1%, Voltage=200V, HelpURL=http://www.farnell.com/datasheets/2310790.pdf, Part Number=R_120R_1206_1, SCH_Footprint=1206, Supplier 1=TME, Supplier 2="RS Components", Supplier 3=Farnell, Supplier 4=Mouser, Supplier 5=Digi-Key, Supplier Part Number 2=6791787, Supplier Part Number 3=1653057, Supplier Part Number 4=71-CRCW1206-120-E3, Supplier Part Number 5=541-120FCT-ND
S1: library part S_TACTSWITCH, "Tact Switch", Manufacturer=Ninigi, Manufacturer Part Number=TACTM-34N-F, HelpURL=http://pl.ninigi.com/product/tactm-34n-f/pdf, Part Number=S_TACTSWITCH, Supplier 1=TME, Supplier 2="RS Components", Supplier 3=Farnell, Supplier 4=Mouser, Supplier 5=Digi-Key, Supplier Part Number 1=TACTM-34N-F
TVS1: library part TVS_CDSOT23-SM712, Current=17A, Manufacturer=Bourns, Manufacturer Part Number=CDSOT23-SM712, Voltage=12V, HelpURL=https://datasheet.octopart.com/CDSOT23-SM712-Bourns-datasheet-13451680.pdf, Part Number=TVS_CDSOT23-SM712, SCH_Footprint=SOT23, Supplier 1=TME, Supplier 2="RS Components", Supplier 3=Farnell, Supplier 4=Mouser, Supplier 5=Digi-Key, Supplier Part Number 2=7673728, Supplier Part Number 3=1824869, Supplier Part Number 4=652-CDSOT23-SM712, Supplier Part Number 5=CDSOT23-SM712CT-ND
U1: library part UP_STM32F103C8T6, Manufacturer=STMicroelectronics, HelpURL=https://datasheet.octopart.com/STM32F103C8T6-STMicroelectronics-datasheet-48026265.pdf, Manufacturer Part Number=STM32F103C8T6, Part Number=UP_STM32F103C8T6, SCH_Footprint=LQFP48, Supplier 1=TME, Supplier 2="RS Components", Supplier 3=Farnell, Supplier 4=Mouser, Supplier 5=Digi-Key, Supplier Part Number 1=STM32F103C8T6, Supplier Part Number 2=1023545, Supplier Part Number 3=1447637, Supplier Part Number 4=511-STM32F103C8T6, Supplier Part Number 5=497-6063-ND
U2: library part U_L6470HTR, Manufacturer=STMicroelectronics, Manufacturer Part Number=L6470HTR, HelpURL=https://pl.mouser.com/datasheet/2/389/l6470-1849602.pdf, Part Number=U_L6470HTR, SCH_Footprint=HTSSOP28, Supplier 1=TME, Supplier 2="RS Components", Supplier 3=Farnell, Supplier 4=Mouser, Supplier 5=Digi-Key, Supplier Part Number 3=2806876, Supplier Part Number 4=511-L6470HTR, Supplier Part Number 5=497-10812-1-ND
U3: library part U_SN74LVC06ARGYR, Manufacturer="Texas Instruments", Manufacturer Part Number=SN74LVC06ARGYR, HelpURL=http://www.ti.com/lit/ds/symlink/sn74lvc06a.pdf, Part Number=U_SN74LVC06ARGYR, SCH_Footprint=QFN14, Supplier 1=TME, Supplier 2="RS Components", Supplier 3=Farnell, Supplier 4=Mouser, Supplier 5=Digi-Key, Supplier Part Number 4=595-SN74LVC06ARGYR, Supplier Part Number 5=296-13957-1-ND
U4: library part U_MAX3076EASD+, "RS-485/RS-422 Transceivers, +3.3V,  ±15kV ESD-Protected, Fail-Safe, Hot-Swap", Manufacturer="Maxim Integrated", Manufacturer Part Number=MAX3076EASD+, HelpURL=https://sigma.octopart.com/138901689/technical_drawing/Maxim-Integrated-MAX3076EASD%2B.pdf, Part Number=U_MAX3076EASD+, SCH_Footprint=SO14, Supplier 1=TME, Supplier 2="RS Components", Supplier 3=Farnell, Supplier 4=Mouser, Supplier 5=Digi-Key, Supplier Part Number 3=2511650, Supplier Part Number 4=700-MAX3076EASD, Supplier Part Number 5=MAX3076EASD+-ND
U5: library part VL_LD39050PU33R, Current=500mA, Manufacturer=STMicroelectronics, Voltage=3.3V, HelpURL=https://www.tme.eu/pl/Document/062513da0f421ddb82a14a498f7bf1c8/LD39050.pdf, Manufacturer Part Number=LD39050PU33R, Part Number=VL_LD39050PU33R, SCH_Footprint=DFN6, Supplier 1=TME, Supplier 2="RS Components", Supplier 3=Farnell, Supplier 4=Mouser, Supplier 5=Digi-Key, Supplier Part Number 1=LD39050PU33R, Supplier Part Number 3=2762703, Supplier Part Number 4=511-LD39050PU33R, Supplier Part Number 5=497-8716-1-ND
X1: library part X_ABM3B-8.000MHZ-B2-T, Manufacturer=Abracon, Manufacturer Part Number=ABM3B-8.000MHZ-B2-T, Supplier Part Number 1=ABM3B-8.000MHZ-B2, HelpURL=https://datasheet.octopart.com/ABM3B-8.000MHZ-B2-T-Abracon-datasheet-12510201.pdf, Part Number=X_ABM3B-8.000MHZ-B2-T, SCH_Footprint=5x3.2mm, Supplier 1=TME, Supplier 2="RS Components", Supplier 3=Farnell, Supplier 4=Mouser, Supplier 5=Digi-Key, Supplier Part Number 2=171-0644, Supplier Part Number 3=2467818, Supplier Part Number 4=815-ABM3B-8.0-B2-T, Supplier Part Number 5=535-9720-1-ND

## Via types
v1: diameter 27.56, hole 11.81, Top Layer to Bottom Layer, tented both sides, 234 vias
v2: diameter 31.5, hole 11.81, Top Layer to Bottom Layer, tented both sides, 10 vias
v3: diameter 125.98, hole 125.98, Top Layer to Bottom Layer, tented both sides, 4 vias

## Nets (pads, with @x,y where several pads share a name; then routed paths per layer and width w, separated by ;. In a path a pad name is that pad's centre, name@x,y a point inside that pad or via, vN(x,y) a via of type N, cw(c..) or ccw(c..) an arc to the next point about the centre after c; other vN are vias at no path point)
+5V: FB1.1 FB2.1 J1.6 R10.1 | length 1638.6
  Top Layer w15: FB2.1 1075,500 v1(1155,420) ; v1(1220,260) 1221.46,258.54 v1@1225,255
  Top Layer w20: J1.6 997.68,-55 1115,-55 1221.46,51.46 1221.46,258.54 R10.1
  Top Layer w40: FB1.1 410,90 620,-120 932.68,-120 J1.6
  Bottom Layer w15: v1(1155,420) 1220,355 v1(1220,260)
BUSY: U1.11 U2.22 | length 273
  Top Layer w10: v1(830,1160) 845.47,1175.47 U2.22 ; v1(870,1120) 905.65,1084.35 905.65,1031.42 882.79,1008.55 U1.11
  Bottom Layer w10: v1(830,1160) v1(870,1120)
C\S\: U1.14 U2.23 | length 290.1
  Top Layer w10: U1.14 782.57,1008.55 756.22,1034.9 756.22,1056.22 800,1100 810,1100 871.06,1161.06 U2.23
CK: U1.15 U2.19 | length 263.5
  Top Layer w10: U1.15 740,1022.79 740,1070 768.7,1098.7 U2.19
EN: R2.2 U5.1 | length 49.7
  Top Layer w10: U5.1 362.16,492.6 366.02,488.74 366.02,487.76 370,483.78 R2.2
F\L\A\G\: U1.10 U2.24 | length 265.6
  Top Layer w10: U2.24 893.78,1230.98 893.78,1136.22 925,1105 925,1022.44 U1.10
GND: C2.2 C3.2 C4.2 C5.2 C6.2 C7.2 C8.2 C10.2 C11.2 C12.2 C13.2 C14.2 C15.2 C16.2 C17.2 C18.2 C19.2 C20.2 C21.2 C22.2 C25.2 C26.2 C27.2 C28.2 C29.2 C30.2 C31.2 C32.2 D3.1 D4.1 D5.1 J1.5 J1.8 J1.9 P1.9 P1.10 P3.9 R12.1 R17.1 S1.2 TVS1.3 U1.8 U1.23 U1.35 U1.47 U2.9 U2.13 U2.21 U2.27 U2.EP1 U3.7 U3.EP1 U4.6 U4.7 U5.2 U5.EP1 X1.2 X1.4 | length 1802.8
  Top Layer w10: v1(270,1180) P3.9 ; v1(490,650) C19.2 ; U1.23 690.08,850 710,850 v1(720,860) ; 730.27,605 U1.35 ; v1(890,920) 890,932.25 924.06,966.3 U1.8 924.55,966.79 950,992.25 v1(950,1080) ; v1(950,810) 980.14,810 1007.57,782.57 U1.47 ; TVS1.3 v1(1000,370) ; R17.1 1099.76,706.22 v1(1126.37,706.22) ; C15.2 v1(1160,810) ; U3.7 1238.54,655 U3.EP1 ; v1(1350,630) 1350.73,629.27 1379.27,629.27 C10.2 ; D5.1 D4.1 D3.1
  Top Layer w15: v1(520,1330) 520,1299.5 539.5,1280 C8.2 580.5,1280 600,1299.5 v1(600,1330) ; v1(664.68,1411.19) 668.08,1411.19 690.12,1433.23 691.41,1433.23 691.41,1465.62 U2.13 ; U2.9 794.29,1388.39 U2.EP1 819.88,1337.2 U2.21 ; U2.27 973.95,1234.38 973.95,1263.95 990,1280 v1(990,1310)
  Top Layer w20: U5.EP1 U5.2 v1(390,530) ; v1(1060,1215) v1(1060,1365) ; C26.2 C22.2 ; C26.2 978.54,140.98 996.11,158.55 998.55,158.55 v1(1000,160) C22.2 ; C26.2 978.54,139.02 998.55,119.01 998.55,111.45 v1(1000,110) 1001.45,111.45 1001.45,120.46 1020,139.02 C22.2
  Bottom Layer w15: v1@663.49,1410 v1(664.68,1411.19)
  other v1: 220,-440 314.23,-440 408.46,-440 502.69,-440 596.92,-440 691.15,-440 785.38,-440 879.61,-440 973.85,-440 1068.08,-440 1162.31,-440 1256.54,-440 1350.77,-440 1445,-440 220,-345.77 314.23,-345.77 408.46,-345.77 502.69,-345.77 596.92,-345.77 691.15,-345.77 785.38,-345.77 879.61,-345.77 973.85,-345.77 1068.08,-345.77 1162.31,-345.77 1256.54,-345.77 1350.77,-345.77 1445,-345.77 220,-251.54 314.23,-251.54 408.46,-251.54 502.69,-251.54 596.92,-251.54 691.15,-251.54 785.38,-251.54 879.61,-251.54 973.85,-251.54 1068.08,-251.54 1162.31,-251.54 1256.54,-251.54 1350.77,-251.54 1445,-251.54 220,-157.31 314.23,-157.31 408.46,-157.31 502.69,-157.31 596.92,-157.31 973.85,-157.31 1068.08,-157.31 1162.31,-157.31 1256.54,-157.31 1350.77,-157.31 1445,-157.31 1275,105 755,115 520,125 825,130 875,145 585,160 1275,175 820,190 585,210 1640,220 1000,235 1275,250 810,270 1640,270 998.62,282.62 860,295 1590,320 1640,320 1325,335 1135,365 1640,370 1325,385 1390,385 1450,385 1550,385 180,390 1110,400 1081.42,430.86 180,440 40,480 210,480 310,500 700,510 750,510 790,510 820,520 310,550 700,560 750,560 790,560 934.23,576.95 900,585 700,600 1243.07,600.47 1293.07,600.47 730,620 1405,630 390,650 440,650 1243.07,650.47 1293.07,650.47 350,670 865,735 885,775 255,785 345,785 440,785 835,820 1160,860 785,885 1545,885 1640,885 1345,925 115,930 430,940 630,950 1320,950 830,960 1545,980 1640,980 430,990 575,1000 630,1000 680,1000 1340,1005 456.45,1033.95 1280.37,1045.84 1010,1055 1355,1075 1010,1090 1180,1100 1215,1100 410,1140 450,1140 1180,1150 1355,1170 1265,1270 1310,1310 25,1320 110,1320 560,1330 1640,1360 25,1405 1640,1455 500,1460 1210.35,1470 1125.35,1555 1210.35,1555 1295.35,1555 200,1640 285,1640 370,1640 455,1640 1125.35,1640 1210.35,1640 1295.35,1640 1380.35,1640 1465.35,1640
  other v2: 746.06,1328.35 789.37,1328.35 832.68,1328.35 875.98,1328.35 919.29,1328.35 746.06,1371.65 789.37,1371.65 832.68,1371.65 875.98,1371.65 919.29,1371.65
LED1: R13.1 U1.2 | length 837.7
  Top Layer w10: U1.2 1008.55,882.79 1033.95,908.19 1058.19,908.19 1071.37,895 1453.79,895 1470,911.21 1470,1010 1455,1025 1455,1185 1486.46,1216.46 R13.1
LED2: R14.1 U1.46 | length 797.2
  Top Layer w10: U1.46 1015.37,747.42 1020.71,747.42 1022.35,745.78 1130.78,745.78 1260,875 1460,875 1490,905 1490,1020 1480,1030 1480,1085 1495,1100 1513.54,1100 R14.1
LED3: R15.1 U1.45 | length 765.2
  Top Layer w10: U1.45 980.71,754.73 1005.44,730 1021.8,730 1022.55,730.75 1149.53,730.75 1273.79,855 1470,855 1514.76,899.76 R15.1
NetC1_1: C1.1 D1.1 U2.11 | length 695.4
  Top Layer w17: v1(740,1520) 743.11,1516.89 U2.11
  Top Layer w20: v1(440,1560) 391,1560 391,1547.5 450,1488.5 C1.1@450,1309.78
  Bottom Layer w20: v1(440,1560) 480,1520 v1(740,1520)
NetC9_1: C9.1 D1.2 D2.1 | length 297.7
  Top Layer w20: C9.1 501.46,1548.54 520,1530 D1.2 ; D2.1@569,1409 D1.2 ; D1.2@569,1560 D1.2
NetC9_2: C9.2 U2.10 | length 333.5
  Top Layer w17: U2.10 768.7,1513.28 772.56,1517.14 v1(772.56,1520)
  Top Layer w20: C9.2 v1(590,1620)
  Bottom Layer w20: v1(590,1620) 660,1550 710,1550 720,1560 757.03,1560 771.11,1545.92 771.11,1521.45 v1(772.56,1520)
NetC12_1: C12.1 U1.6 X1.3 | length 445.4
  Top Layer w10: U1.6 1063.92,1050 1219.68,1050 1266.93,1097.24 X1.3 1280,1098.5 C12.1@1280,1150
NetC13_1: C13.1 U1.5 X1.1 | length 310
  Top Layer w10: U1.5 1044.51,1002.76 X1.1 1169.68,1002.76 1221.46,950.98 C13.1@1221.46,950
NetC21_1: C21.1 C23.1 R18.2 R19.2 TVS1.1 U4.9 U4.12 | length 924
  Top Layer w20: U4.9 737,213 692,213 680,225 680,345.07 691.93,357 737,357 743,363 783,363 853.78,433.78 885.24,433.78 C23.1 ; C23.1@890.98,438.54 895.75,443.31 895.75,448.28 907.46,460 1002.52,460 1037.4,425.12 TVS1.1 1037.4,397.56 1039.21,395.75 1052.99,395.75 1080,368.74 C21.1 1080,273 R19.2 1110,260 1127.09,242.91 R18.2
NetC23_2: C23.2 C25.1 R19.1 R20.2 TVS1.2 U4.10 U4.11 | length 597.3
  Top Layer w20: U4.10 U4.11 808.28,310 820,321.72 820,350 851.46,381.46 C23.2 912.05,381.46 932.72,381.46 ; R20.2 872.91,242.91 890,260 R19.1@920,260 ; 912.05,376.69 920,368.74 ; R19.1 R19.1@920,260 ; TVS1.2 962.6,397.56 946.65,381.61 946.5,381.46 932.72,381.46 ; R19.1@920,260 C25.1 920,368.74 ; 920,368.74 932.72,381.46
NetC27_1: C27.1 C28.1 FB2.2 U4.14 | length 277.8
  Top Layer w20: U4.14 820,460 861.46,501.46 C28.1 C27.1 998.54,501.46 FB2.2
NetD3_2: D3.2 R13.2 | length 84.7
  Top Layer w10: R13.2 1515.98,1273.54 1563.78,1225.75 1564.72,1225.75 D3.2
NetD4_2: D4.2 R14.2 | length 61.9
  Top Layer w10: R14.2 1571.93,1158.54 D4.2
NetD5_2: D5.2 R15.2 | length 46.7
  Top Layer w10: R15.2 1571.85,1091.38 D5.2
NetFB1_2: FB1.2 R1.1 | length 56.5
  Top Layer w20: FB1.2 R1.1
NetP1_1: P1.1 P1.2 R8.2 R10.2 R11.2 | length 446.5
  Top Layer w20: R10.2 R11.2 R8.2 1278.54,395.98 1312.56,430 P1.2 P1.1
NetP1_3: P1.3 U3.11 | length 458.6
  Top Layer w10: U3.11@1268.07,567.17 1268.07,521.93 1300,490 1414.41,490 1470.47,546.06 1470.47,546.37 1504.1,580 1560,580 P1.3
NetP1_4: P1.4 U3.9 | length 391
  Top Layer w10: U3.9@1228.35,558.89 U3.9 1228.7,491.3 1260,460 1440,460 P1.4
NetP1_5: P1.5 U3.1 | length 292.3
  Top Layer w10: U3.1@1346.93,659.53 1449.53,659.53 1470,680 1560,680 P1.5
NetP1_6: P1.6 U3.13 | length 265.3
  Top Layer w10: U3.13 1323.9,558.54 1347.44,535 1438.2,535 1455.47,552.28 1455.47,552.59 1500.61,597.73 1500.61,620.61 P1.6
NetP1_7: P1.7 U3.5 | length 441.9
  Top Layer w10: U3.5 1248.39,747.02 1270.9,769.53 1570.47,769.53 P1.7
NetP1_8: P1.8 U3.3 | length 261.6
  Top Layer w10: U3.3@1287.76,679.63 1287.76,711.22 1289.85,711.22 1308.63,730 P1.8
NetP2_1: P2.1 U2.1 | length 111.7
  Top Layer w20: 980,1570 999.02,1550.98 U2.1
NetP2_2: P2.2 U2.28 | length 584.1
  Top Layer w20: P2.2 930,1650 1020,1650 1040,1630 1040,1400 1020,1380 1020,1271.26 U2.28@1000.16,1251.42
NetP2_3: P2.3 U2.14 | length 192.7
  Top Layer w20: U2.14 666.34,1506.34 752.53,1592.53 772.53,1592.53 P2.3
NetP2_4: P2.4 U2.15 | length 410.2
  Top Layer w20: U2.15 666.34,1347.61 620,1393.95 620,1540 P2.4
NetR3_1: R3.1 R5.2 U4.5 | length 378.3
  Top Layer w10: U4.5 470,260 460,270 460,500 470,510 490,510 R5.2@540,510
NetR6_1: R6.1 U4.2 | length 173.9
  Top Layer w10: U4.2 570,410 600,440 R6.1
NetR7_2: R7.2 U4.3 U4.4 | length 294.6
  Top Layer w10: U4.4 U4.3 570,360 650,440 R7.2
NetR9_1: R9.1 R12.2 U2.5 | length 309.6
  Top Layer w17: U2.5 896.79,1466.28 896.79,1493.93 920,1517.14 v1(920,1520) ; R9.1 v1(1080,1500) R12.2@1080,1521.46
  Bottom Layer w17: v1(920,1520) 950,1550 1030,1550 v1(1080,1500)
NetR17_2: R17.2 U1.44 | length 82.1
  Top Layer w10: U1.44 1007.11,700 R17.2@1031.46,700
OUT: C2.1 C3.1 C4.1 C5.1 C10.1 C11.1 C14.1 C15.1 C16.1 C18.1 C19.1 C20.1 C31.1 C32.1 P3.1 R3.2 R8.1 R16.1 U1.1 U1.9 U1.24 U1.36 U1.48 U2.6 U2.17 U3.14 U5.4 | length 4969.5
  Top Layer w10: U1.36 799.74,646.63 800.93,646.63 828.29,619.27 829.02,618.54 C20.1 ; U1.9 910.14,980.22 860,930.09 860,900 920,840 980,840 ; U1.1 U1.1@1021.49,868.87 ; C15.1@1070,808.54 C15.1 1035.49,810 U1.48 U1.48@1001.1,817.37 ; C16.1 1041.69,860 1027.99,873.7 1026.32,873.7 U1.1@1021.49,868.87 ; U3.14 1345.83,595.94 1370.32,571.46 C10.1 C11.1 ; 980,840 992.62,840 ; 980,840 980,838.47 989.23,829.23 ; 989.23,829.23 U1.48@1000.76,817.71 ; 989.23,829.23 992.62,832.62 992.62,840 ; 992.62,840 U1.1@1001.1,848.48 ; 992.62,840 1000.76,831.87 U1.48@1000.76,817.71 ; U1.48@1000.76,817.71 U1.48@1001.1,817.37 ; U1.48@1001.1,817.37 U1.1@1001.1,848.48 ; U1.1@1001.1,848.48 U1.1@1021.49,868.87
  Top Layer w15: U5.4@259.41,567.99 259.41,619.41 C32.1 C31.1 260,700 301.46,741.46 390,741.46 440,741.46 490,741.46 531.46,741.46 ; P3.1 330,940 358.78,911.22 380,890 531.46,890 ; R3.2 490,600 531.46,641.46 531.46,740 531.46,741.46 ; C2.1@518.54,939.02 C2.1 C3.1 518.54,1009.02 548.54,1039.02 C5.1 549.27,1040.73 549.27,1089.27 C4.1 610,1090 640,1120 660,1120 v1(710,1170) 717.52,1177.52 U2.17 ; v1(640,700) 590,700 548.54,741.46 531.46,741.46 ; U1.24 572.24,940 549.02,940 ; U1.36 787.68,634.57 787.68,632.32 v1(800,620) ; U1.36@800,640 v1(800,620) ; 811.22,630.39 800.82,620 v1(800,620) ; C20.1 829.27,619.27 828.29,619.27 800.73,619.27 v1(800,620) ; v1(990,550) 992.4,547.6 1019.29,547.6 1045.53,521.36 1103.35,521.36 1214.19,410.51 1214.19,403.25 R8.1@1221.46,403.25 ; v1(1070,780) C15.1@1070,808.54 ; R8.1 R8.1@1221.46,403.25 ; v1(1221.46,423.54) R8.1@1221.46,403.25 ; 531.46,741.46 531.46,890 ; 531.46,890 531.46,922.43 ; 531.46,922.43 531.46,926.1 525,932.56 525,939.19 525.81,940 549.02,940 ; 531.46,922.43 549.02,940
  Top Layer w17: v1(860,1520) 870.93,1509.07 870.93,1466.28 U2.6
  Bottom Layer w15: v1(640,700) 720,700 v1(800,620) 870,550 v1(990,550) 1070,630 v1(1070,780) ; v1(710,1170) 765,1225 960,1225 1035,1150 1075,1150 1105,1180 1105,1385 1010,1480 900,1480 v1(860,1520) ; v1(1221.46,423.54) 1333.54,423.54 1405,495 v1(1405,572.95)
PG: R4.2 U5.3 | length 163.1
  Top Layer w10: U5.3 392.6,567.4 420,540 R4.2
R\E\S\E\T\: C17.1 P3.10 R16.2 S1.1 U1.7 | length 2088.5
  Top Layer w10: R16.2 301.46,910.98 260,952.44 260,1120 244.03,1135.97 244.03,1165.97 238.7,1171.3 ; v1(420,1180) 380,1220 252.38,1220 246.53,1214.14 246.53,1196.53 238.7,1188.7 ; U1.7 975,988.92 975,1120.25 970,1125.25 v1(970,1130) ; P3.10 P3.10@193.86,1180 ; P3.10 185.16,1171.3 P3.10@202.56,1171.3 ; P3.10 P3.10@185.16,1188.7 ; P3.10@185.16,1188.7 P3.10@193.86,1180 ; P3.10@185.16,1188.7 238.7,1188.7 ; P3.10@193.86,1180 230,1180 ; P3.10@193.86,1180 P3.10@202.56,1171.3 ; P3.10@202.56,1171.3 238.7,1171.3 ; 230,1180 238.7,1171.3 ; 230,1180 238.7,1188.7 ; 238.7,1171.3 238.7,1188.7
  Top Layer w15: v1(970,1130) 973.37,1133.37 1093.37,1133.37 1171.46,1211.46 C17.1 1387.91,1211.46 S1.1@1410,1233.54
  Bottom Layer w10: v1(420,1180) 470,1230 610,1230 693.78,1146.22 726.22,1146.22 772.5,1192.5 837.5,1192.5 900,1130 v1(970,1130)
RS485HD_TXD+: C22.1 C24.1 J1.1 R18.1 | length 189.7
  Top Layer w20: C24.1 R18.1 1073.54,186.46 1073.54,143.54 C22.1 1077.09,94.25 1049.68,66.84 J1.1
RS485HD_TXD-: C24.2 C26.1 J1.2 R20.1 | length 187.4
  Top Layer w20: J1.2 941.68,69.76 921.46,89.98 C26.1 925.73,144.27 925.73,185.73 R20.1 C24.2
S\T\B\Y\: U1.3 U2.3 | length 852.8
  Top Layer w10: U1.3 1027.44,930 v1(1070,930)
  Top Layer w17: U2.3 947.83,1504.98 959.65,1516.79 v1(959.65,1519.65)
  Bottom Layer w10: v1(959.65,1519.65) 1000.35,1519.65 1125,1395 1125,1170 1070,1115 v1(1070,930)
SDI: U1.17 U2.20 | length 336.1
  Top Layer w10: v1(710,1120) 710,997.6 740.81,966.79 U1.17 ; v1(794.29,1168.72) U2.20
  Bottom Layer w10: v1(710,1120) 740,1120 787.36,1167.36 792.93,1167.36 v1(794.29,1168.72)
SDO: U1.16 U2.18 | length 273.5
  Top Layer w10: U2.18 743.11,1103.11 725,1085 725,1010.44 754.73,980.71 U1.16
SS1: U1.43 U3.2 | length 676
  Top Layer w10: U1.43 1000.02,679.25 1133.03,679.25 1180.75,726.97 1180.75,730.75 1260,810 v1(1380,810) ; U3.2 1307.44,693.1 1308.28,693.94 1366.54,693.94 v1(1368.07,695.47)
  Bottom Layer w10: v1@1380,700 v1(1380,810)
SS2: U1.42 U3.4 | length 456.2
  Top Layer w10: U1.42 991.43,660 1140,660 1210,730 v1(1220,730) ; U3.4 1268.07,723.07 1280,735 v1(1280,745)
  Bottom Layer w10: v1(1220,730) 1265,730 v1(1280,745)
SS3: U1.41 U3.6 | length 349.9
  Top Layer w10: U1.41 925.04,699.05 979.09,645 1150,645 1197.97,692.97 1227.86,692.97 1228.7,693.8 U3.6@1228.7,696.93
SS4: U1.40 U3.8 | length 327.5
  Top Layer w10: U1.40 965.76,630 1021.43,630 1055.49,595.94 1179.06,595.94 U3.8
SS5: U1.39 U3.10 | length 548.6
  Top Layer w10: U1.39 952.92,615 1008.6,615 1063.6,560 1163.63,560 1195,528.63 v1(1195,485) ; U3.10 1248.39,499.91 1248.97,499.91 1258.36,490.52 v1(1263.11,490.52)
  Bottom Layer w10: v1(1195,485) 1257.6,485 v1(1263.11,490.52)
SS6: U1.38 U3.12 | length 546
  Top Layer w10: U1.38 940.08,600 995.76,600 1050.76,545 1145,545 v1(1170,520) ; U3.12 1288.1,558.2 1288.1,544.56 1315,517.66 v1(1315,515)
  Bottom Layer w10: v1(1170,520) 1310,520 v1(1315,515)
STCK: U1.4 U2.25 | length 454
  Top Layer w10: v1(920,1160) 920,1231.61 U2.25 ; U1.4 980.42,910.63 1029.8,960 v1(1040,960)
  Bottom Layer w10: v1(920,1160) 990,1160 1050,1100 1050,974.64 1040,964.64 v1(1040,960)
SWCLK: P3.4 U1.37 | length 939.1
  Top Layer w10: P3.4 186.39,1020.06 229.94,1020.06 240,1010 240,910 300,850 v1(480,850) ; v1(740,820) 830,730 830,682.24 U1.37
  Bottom Layer w10: v1(480,850) 510,820 v1(740,820)
SWDIO: P3.2 U1.34 | length 828.5
  Top Layer w10: P3.2 176.46,923.54 270,830 459.3,830 479.3,810 v1(480,810) ; v1(740,780) 800,720 800,703.05 768.65,671.7 U1.34
  Bottom Layer w10: v1(480,810) 480,805.86 485.86,800 719.3,800 739.3,780 v1(740,780)
USART1_DE: R7.1 U1.32 | length 158.1
  Top Layer w10: R7.1 650,608.24 U1.32
USART1_RX: R6.2 U1.31 | length 187.6
  Top Layer w10: R6.2 600.98,578.54 610.75,588.31 610.75,596.83 U1.31
USART1_TX: R5.1 U1.30 | length 242.8
  Top Layer w10: R5.1 550,610 560,620 606.08,620 U1.30
USART2_RX: P3.5 U1.13 | length 521.6
  Top Layer w10: P3.5 340,1070 v1(410,1070) ; U1.13 794.83,1023.64 794.83,1024.83 v1(810,1040)
  Bottom Layer w10: v1(410,1070) 480,1070 510,1040 v1(810,1040)
USART2_TX: P3.3 U1.12 | length 719.1
  Top Layer w10: P3.3 v1(410,1030) ; v1(860,1050) 877.85,1032.15 877.85,1030.97 U1.12
  Bottom Layer w10: v1(410,1030) 409.65,1030.35 389.65,1030.35 380,1040 380,1090 390,1100 480,1100 520,1060 780,1060 793.19,1073.19 826.81,1073.19 846.64,1053.36 856.64,1053.36 v1(860,1050)
VCC_IN_12V: C1.2 C6.1 C7.1 C8.1 D2.2 J1.3 J1.4 R9.2 R11.1 U2.2 U2.12 U2.16 U2.26 | length 6111.4
  Top Layer w20: D2.2 391,1270 391,1259 480,1170 491,1170 560,1170 v1(560,1200) ; C8.1@520,1177 v1(520,1200) ; C8.1 C8.1@583,1160 ; v1(600,1200) 600,1177 C8.1@583,1160 ; U2.12 717.52,1427.52 691.93,1401.93 U2.16 691.93,1192.63 659.3,1160 C8.1@583,1160 ; J1.3 888.68,0 1120,0 1185,65 1185,325 1199.25,339.25 1216.69,339.25 1221.46,344.02 R11.1 ; U2.2 973.43,1423.43 960,1410 960,1292.72 947.83,1280.56 U2.26 947.83,1182.17 960,1170 1080,1170 v1@1155,1245 ; R9.2 1080.73,1410.73 1129.27,1410.73 C6.1 1134.76,1405.24 1164.76,1405.24 1190,1380 C7.1@1190,1313 ; v1(1150,1250) 1160,1250 C7.1@1195,1285 ; v1(1150,1290) C7.1 C7.1@1190,1313 ; v1(1150,1330) 1173,1330 C7.1@1190,1313
  Top Layer w40: v1(150,670) v1(127.5,692.5) v1(100,720) 60,760 60,1220 110,1270 391,1270 491,1170 ; v1(620,340) v1(620,310) v1(620,280) 635,265 635,144.68 J1.4 J1.3
  Bottom Layer w20: v1(520,1200) 540,1200 ; v1(600,1200) 580,1200 ; v1(1150,1330) v1(1150,1290) v1(1150,1250) 1149.04,1249.04 1149.04,1159.04 1110,1120 1110,910 1090,890 1030,890 1000,920 1000,970 890,1080 860,1080 840,1100 780,1100 760,1080 590,1080 560,1110 560,1180 ; 540,1200 560,1180 ; 540,1200 v1(560,1200) ; 560,1180 580,1200 ; 560,1180 v1(560,1200) ; v1(560,1200) 580,1200
  Bottom Layer w40: v1(100,720) v1(127.5,692.5) v1(150,670) 220,600 390,600 620,370 v1(620,340) v1(620,310) v1(620,280)
Vin: C29.1 C30.1 R1.2 R2.1 R4.1 U5.6 | length 304.3
  Top Layer w20: U5.6 258.82,464.02 263.78,459.06 263.78,444.76 C30.1 C29.1 R2.1 R4.1 420,370 415.75,365.75 415.75,353.31 410.98,348.54 R1.2
pads on no net: J1.0 J1.7 P3.6 P3.7 P3.8 U1.18 U1.19 U1.20 U1.21 U1.22 U1.25 U1.26 U1.27 U1.28 U1.29 U1.33 U2.4 U2.7 U2.8 U4.1 U4.8 U4.13 U5.5
copper on no net:
  other v3: 222.44,222.44 1442.91,222.44 222.44,1442.91 1442.91,1442.91

## Polygon pours and split planes (outlines as drawn)
GND on Top Layer "NONET_L02_P-001" (solid, remove dead copper, pour order 1): 200,1660 5,1465 5,200 205,0 205,-455 1460,-455 1460,0 1660,200 1660,1465 1465,1660
no net on Top Layer "NONET_L02_P-001" (solid, pour order 0): 200,1660